# Altium PCB CH32F&V208W-R0.PcbDoc (part 1 of 3)
Units mm, origin at the board's own origin, x right, y up, seen from the top; angles counter-clockwise.
Board outline 86.5 x 95 mm, 2 copper layers (Top Layer, Bottom Layer); 65 components, 96 nets, 363 pads, 852 vias.
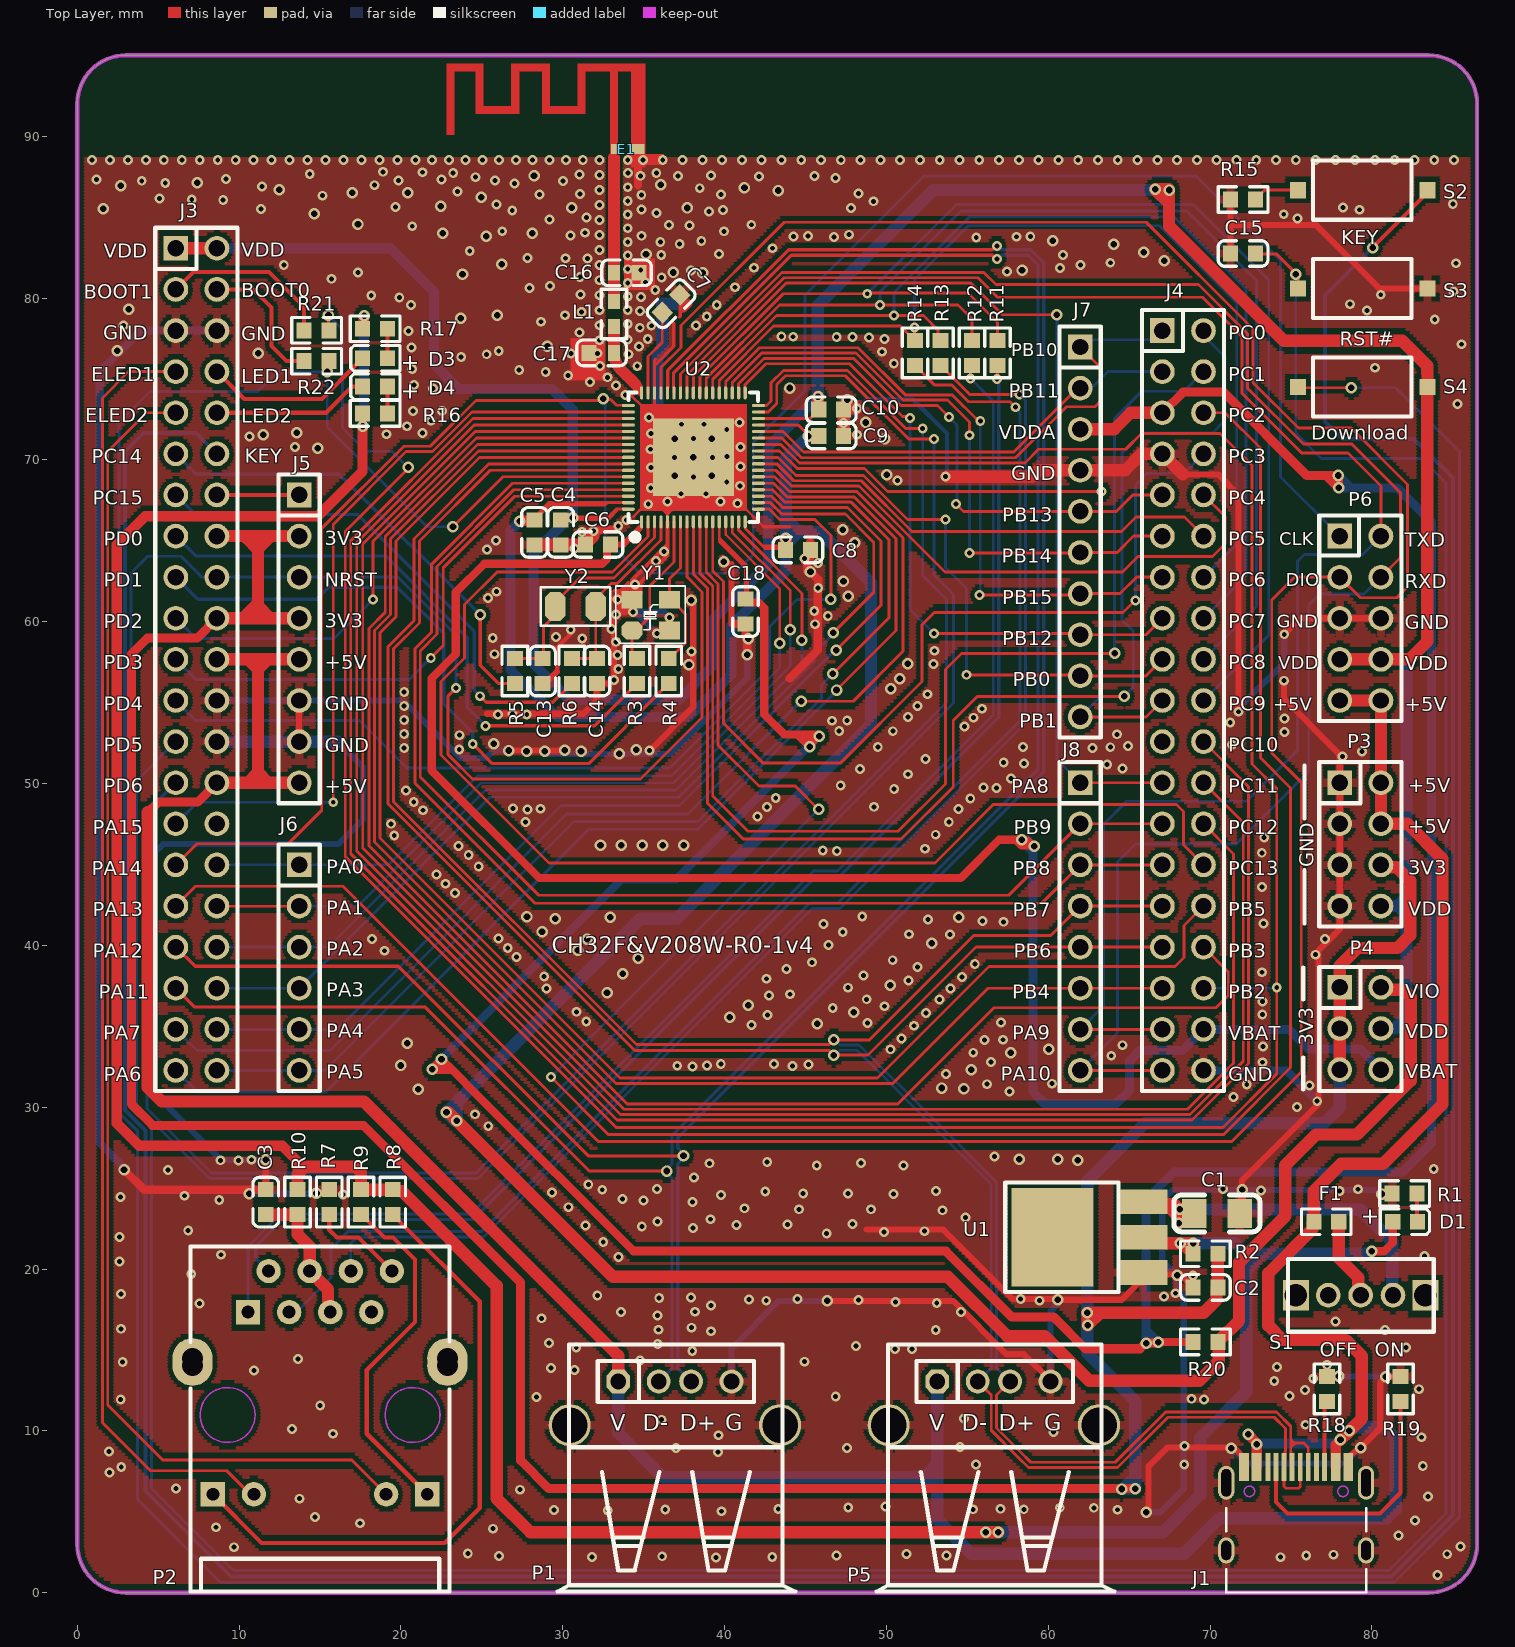
[diagram p0: Top Layer view]
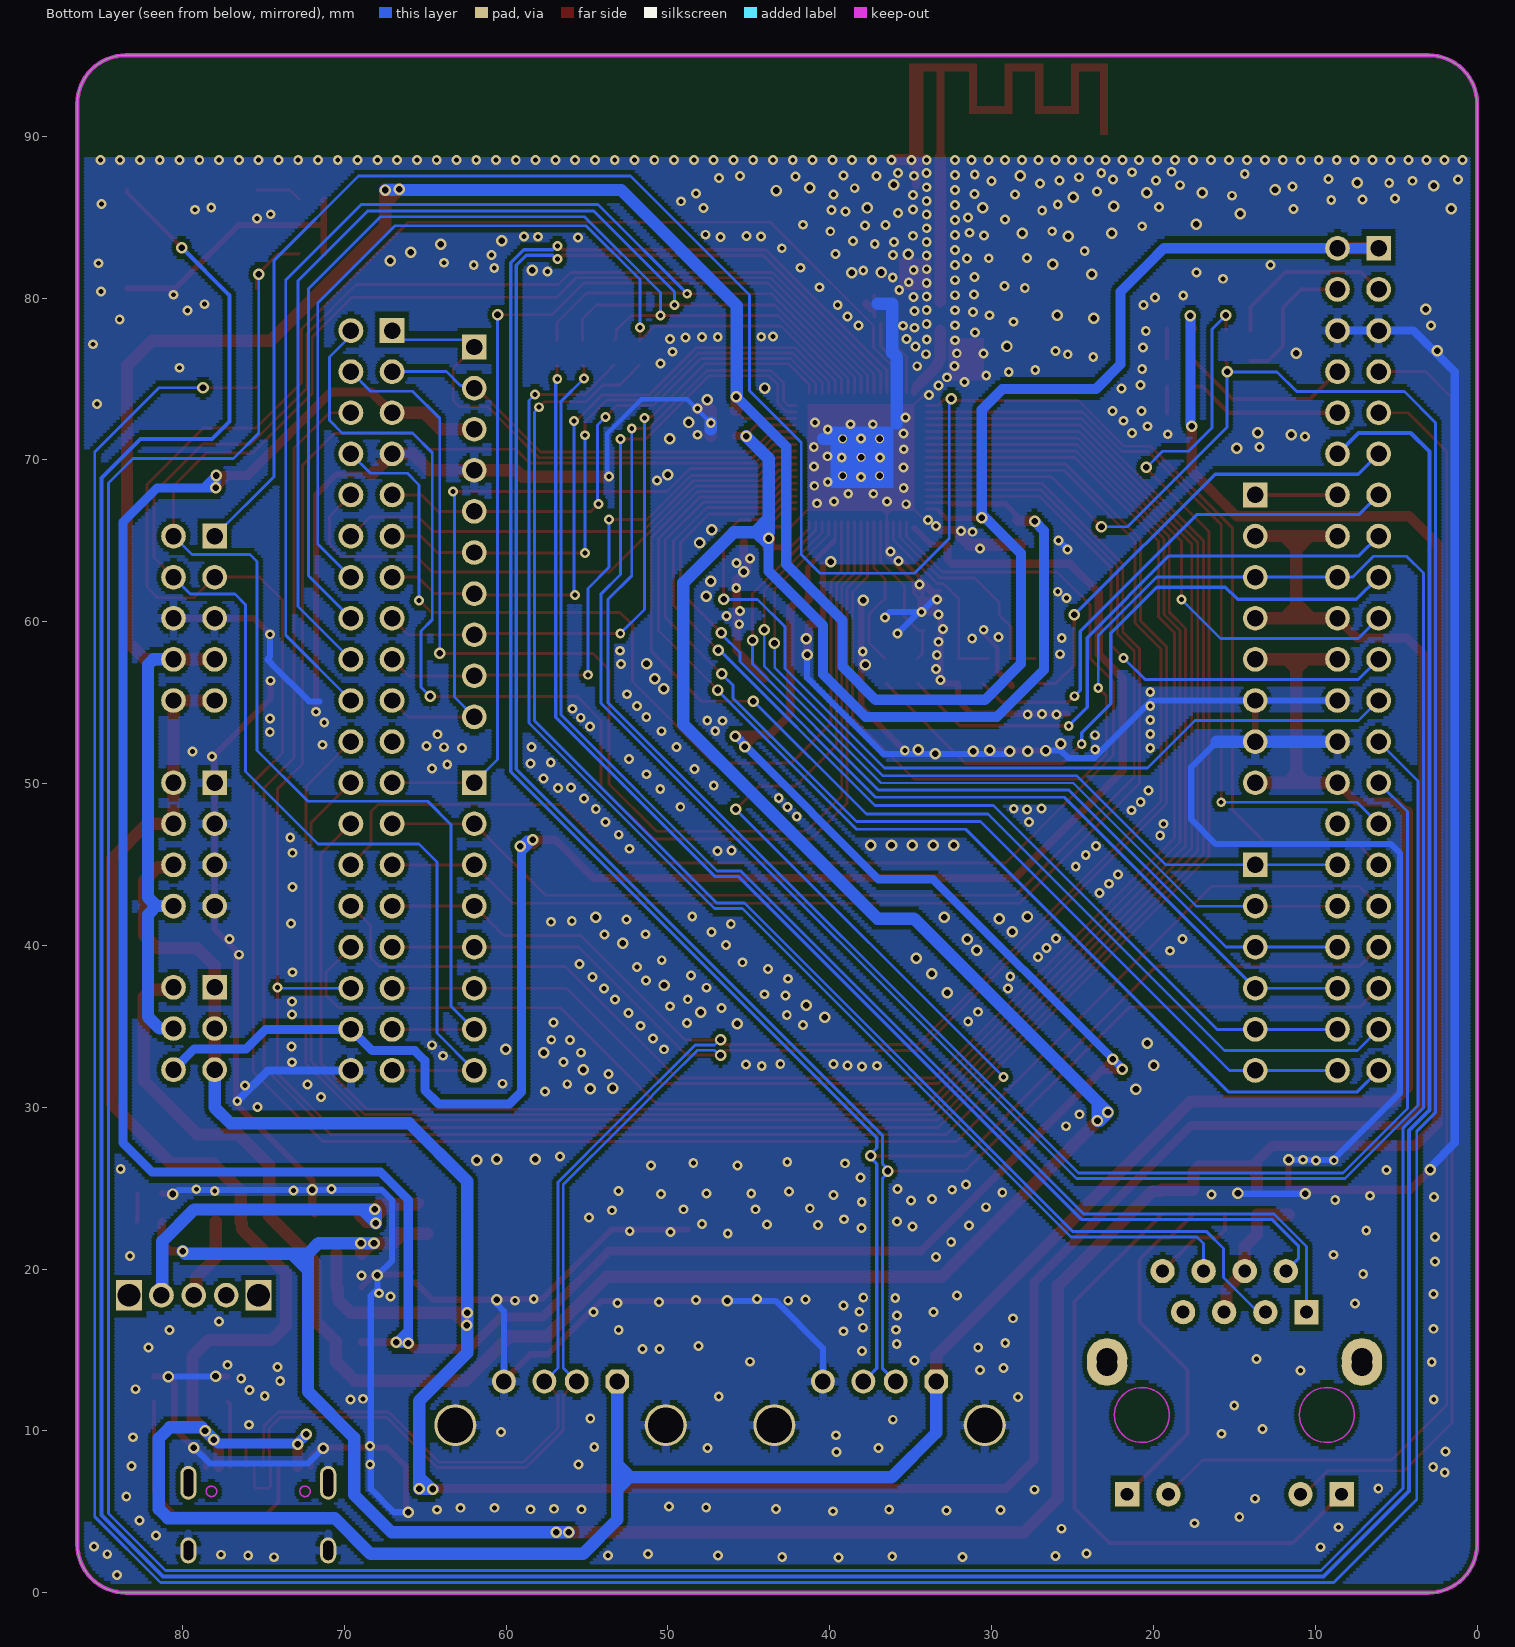
[diagram p1: Bottom Layer view, seen from below]

## Layer stack, top to bottom
Top Solder: solder mask 0.0102, Solder Resist, Dk 3.5
Top Layer: signal copper 0.0356
Dielectric 1: dielectric 0.32, FR-4, Dk 4.8
Bottom Layer: signal copper 0.0356
Bottom Solder: solder mask 0.0102, Solder Resist, Dk 3.5

## Board outline
0,3 ccw(c3,3) 3,0 83.5,0 ccw(c83.5,3) 86.5,3 86.5,92 ccw(c83.5,92) 83.5,95 3,95 ccw(c3,92) 0,92

## Design rules (kind name [scope] priority, off if disabled: settings)
Clearance Clearance_2 [InNet('ANT') or InNet('NetC16_2')] p1: gap=0.152 ignorepadtopadclearanceinfootprint=FALSE
Clearance Clearance_1 [InPolygon] p2: gap=0.254 ignorepadtopadclearanceinfootprint=FALSE
Clearance [All] p3: gap=0.152 ignorepadtopadclearanceinfootprint=FALSE except(0.203: Arc-Via Track-Via)
ComponentClearance [All] p1 off: gap=0.254 collisioncheckmode=3 verticalgap=0.254 showdistances=FALSE
DiffPairsRouting [All] p1: maxlimit=0.254 minlimit=0.152 mostfreqgap=0.152 toplayer_minwidth=0.127 toplayer_maxwidth=0.381 toplayer_prefwidth=0.203 bottomlayer_minwidth=0.127 bottomlayer_maxwidth=0.381 bottomlayer_prefwidth=0.203 maxuncoupledlength=12.7
MinimumSolderMaskSliver [All] p1 off: minsoldermaskwidth=0.254
PolygonConnect PolygonConnect_1 [IsVia] p1: connectstyle=Direct reliefconductorwidth=0.254 reliefentries=4 polygonreliefangle="90 Angle" airgapwidth=0.254
PolygonConnect [All] p2: connectstyle=Relief reliefconductorwidth=0.508 reliefentries=4 polygonreliefangle="90 Angle" airgapwidth=0.254
RoutingVias [All] p1: holewidth=0.406 width=0.711 viastyle="Through Hole" minholewidth=0.305 minwidth=0.61 maxholewidth=0.711 maxwidth=1.27
SilkToSilkClearance [All] p1 off: silktosilkclearance=0.254
SilkToSolderMaskClearance [IsPad] p1 off: minsilkscreentomaskgap=0.254 clearancetoexposedcopper=TRUE
SolderMaskExpansion [All] p1: expansion=0.102 istentingtop=FALSE
Width [All] p1: maxlimit=2.54 minlimit=0.152 preferedwidth=0.254
25 further rules are at their usual default settings.

## Classes and differential pairs
differential pair NewDifferentialPair2: +PB6 -PB7
differential pair NewDifferentialPair1: +PA11 -PA12

## Components (designator, comment, footprint, x,y, rotation, side; value= is the part's Value field where it differs from the comment)
C1 "10uF" 3216_C 69.027,23.44 r180 top
C2 "10uF" 0603_C#1 70.479,18.865 r180 top
C3 "1uF" 0603_C#1 11.645,24.905 r270 top
C4 "0.1uF" 0603_C#1 29.875,66.291 r270 top
C5 "0.1uF" 0603_C#1 28.252,64.751 r90 top
C6 "0.1uF" 0603_C#1 32.943,64.776 r180 top
C7 "1uF" 0603_C#1 36.149,79.104 r45 top
C8 "0.1uF" 0603_C#1 43.758,64.44 r0 top
C9 "0.1uF" 0603_C#1 45.815,71.476 r0 top
C10 "0.1uF" 0603_C#1 47.355,73.102 r180 top
C13 "12pF" 0603_C#1 28.757,56.185 r90 top
C14 "12pF" 0603_C#1 32.114,56.185 r90 top
C15 "0.1uF" 0603_C#1 71.266,82.754 r0 top
C16 "1.5pF" 0603_C#2 34.705,81.561 r180 top
C17 "1pF" 0603_C#2 31.626,76.609 r0 top
C18 "0.1uF" 0603_C#1 41.291,61.391 r270 top
D1 "power" 0603+ 81.284,22.922 r0 top
D3 "RED" 0603+ 19.17,76.277 r180 top
D4 "RED" 0603+ 19.17,74.524 r180 top
E1 "ANTENNA" ANT-F-1-2.4G-1.6 33.17,89.204 r0 top
F1 "500mA" 0603#1 76.407,22.922 r0 top
J1 "TYPE-C-Receptacle-2.0" TYPE-C-Receptacle-2.0 75.316,7.763 r0 top
J3 "Header 21X2" IDC42-2.54mm 6.09,83.072 r0 top locked
J4 "Header 19X2" IDC38-2.54mm 67.05,77.992 r0 top locked
J5 "Header 8" SIP8-2.54mm 13.71,67.832 r0 top locked
J6 "Header 6" SIP6-2.54MM 13.71,44.972 r0 top locked
J7 "Header 10" SIP10-2.54mm 61.97,76.976 r0 top locked
J8 "Header 8" SIP8-2.54mm 61.97,50.052 r0 top locked
L1 "1.8nH" 0603#2 33.165,78.244 r90 top
P1 "USB" USBAF 33.427,13.054 r0 top
P2 "HR911105A" HR911105A 10.55,17.336 r0 top
P3 "HEADER 4x2" IDC8-2.54mm 78.014,50.052 r0 top
P4 "Psel" IDC6-2.54mm 78.014,37.402 r270 top
P5 "USB" USBAF 53.138,13.054 r0 top
P6 "LINK" IDC10-2.54mm 78.014,55.132 r0 top
R1 "1K" 0603#1 81.249,24.665 r0 top
R2 "0Ω" 0603#1 70.479,20.943 r180 top
R3 "NC(0R)" 0603#1 34.581,56.185 r90 top
R4 "NC(0R)" 0603#1 36.544,56.185 r90 top
R5 "NC(0R)" 0603#1 27.041,56.185 r90 top
R6 "NC(0R)" 0603#1 30.56,56.185 r90 top
R7 "0Ω" 0603#1 15.57,24.905 r270 top
R8 "1K" 0603#1 19.494,24.905 r270 top
R9 "1K" 0603#1 17.532,24.905 r270 top
R10 "0Ω" 0603#1 13.607,23.365 r90 top
R11 "NC(0R)" 0603#1 56.864,77.385 r270 top
R12 "NC(0R)" 0603#1 55.281,77.385 r270 top
R13 "NC(0R)" 0603#1 53.342,77.385 r270 top
R14 "NC(0R)" 0603#1 51.759,77.385 r270 top
R15 "10K" 0603#1 71.266,86.089 r0 top
R16 "1K" 0603#1 17.63,72.873 r0 top
R17 "1K" 0603#1 17.63,78.105 r0 top
R18 "NC(5.1K)" 0603#1 77.217,11.825 r90 top
R19 "NC(5.1K)" 0603#1 81.768,11.825 r90 top
R20 "0Ω" 0603#1 70.479,15.498 r180 top
R21 "10K" 0603#1 15.554,78.004 r180 top
R22 "10K" 0603#1 14.014,76.099 r0 top
S1 "SW SPDT" KEY_B 83.3,18.388 r180 top
S2 "KEY" SMD_6.1x3.65x2.5mm-KEY 83.423,86.665 r180 top
S3 "RST#" SMD_6.1x3.65x2.5mm-KEY 83.423,80.582 r180 top
S4 "Download" SMD_6.1x3.65x2.5mm-KEY 83.423,74.499 r180 top
U1 "1117-3.3V" SOT-223 65.851,19.784 r90 top
U2 "CH32V208W" QFN68_8x8 38.068,70.156 r0 top
Y1 "32MHz" XT3225 34.283,59.462 r0 top
Y2 "32768Hz" FC-135 29.534,60.935 r0 top

## Footprints (in the part's own frame and the unit in brackets; to place one, negate y for a bottom-side part, rotate by r counter-clockwise, add the part's x,y. Pads: shape width x height; smd on the part's side, far side on the other; paste and mask are expansions set on the pad)
0603#1 [mm]
  rect 0.93x0.98 smd: 1(0,0) 2(1.54,0)
  silkscreen extent -0.76,-0.79 2.3,0.79
0603#2 [mm]
  rect 0.93x0.714 smd: 1(0,0) 2(1.54,0)
  silkscreen extent -0.76,-0.79 2.3,0.79
0603+ [mm]
  rect 0.93x0.98 smd: 1(0,0) 2(1.54,0)
  silkscreen extent -0.76,-0.79 2.27,0.79
0603_C#1 [mm]
  rect 0.93x0.98 smd: 1(0,0) 2(1.54,0)
  silkscreen extent -0.76,-0.79 2.31,0.79
0603_C#2 [mm]
  rect 0.93x0.98 smd: 1(0,0)
  rect 0.714x0.98 smd: 2(1.54,0)
  silkscreen extent -0.76,-0.79 2.31,0.79
3216_C [mil]
  rect 60x70 smd: 1(0,0) 2(-110,0)
  silkscreen extent -160,-45 50,45
ANT-F-1-2.4G-1.6 [mm]
  rect 0.8x0.6 smd mask+0: 0(1.483,0)
  rect 0.4x0.6 smd mask+0: 1(0,0)
  Top Layer region: 0.24,5.027 -0.26,5.027 -0.26,-0.304 0.24,-0.304
  Top Layer region: 1.94,5.002 1.04,5.002 1.04,-0.304 1.94,-0.304
  Top Layer region: 1.94,5.296 -2.26,5.296 -2.26,4.796 1.94,4.796
  Top Layer region: -1.76,4.977 -2.26,4.977 -2.26,2.157 -1.76,2.157
  Top Layer region: -1.85,2.651 -4.39,2.651 -4.39,2.156 -1.85,2.156
  Top Layer region: -3.96,4.976 -4.46,4.976 -4.46,2.156 -3.96,2.156
  Top Layer region: -3.96,5.296 -6.36,5.296 -6.36,4.796 -3.96,4.796
  Top Layer region: -5.86,4.977 -6.36,4.977 -6.36,2.157 -5.86,2.157
  Top Layer region: -5.875,2.657 -8.364,2.657 -8.364,2.157 -5.875,2.157
  Top Layer region: -8.06,4.977 -8.56,4.977 -8.56,2.157 -8.06,2.157
  Top Layer region: -8.06,5.296 -10.36,5.296 -10.36,4.796 -8.06,4.796
  Top Layer region: -9.86,4.976 -10.36,4.976 -10.36,0.856 -9.86,0.856
FC-135 [mil]
  oct 50x70 smd: 1(0,0) 2(98.43,0)
  silkscreen extent -35,-47 133,47
HR911105A [mm]
  rect 1.5x1.5 hole 0.8: 1(0,0) 9(-2.175,-11.252) 12(11.075,-11.252)
  round 1.5 hole 0.8: 2(1.27,2.54) 3(2.54,0) 4(3.81,2.54) 5(5.08,0) 6(6.35,2.54) 7(7.62,0) 8(8.89,2.54) 10(0.365,-11.252) 11(8.535,-11.252)
  round 2.5 hole 1.3: ""(-3.43,-2.852) ""(-3.43,-3.3) ""(12.32,-3.3) ""(12.32,-2.852)
  Keep-Out Layer circle w0.1: c10.165,-6.352 r1.7
  Keep-Out Layer circle w0.1: c-1.265,-6.352 r1.7
  silkscreen extent -3.55,-17.27 12.45,4.06
IDC6-2.54mm [mil]
  rect 60x60 hole 40: 1(0,0)
  round 60 hole 40: 2(0,100) 3(100,0) 4(100,100) 5(200,0) 6(200,100)
  silkscreen extent -50,-50 252,150
IDC8-2.54mm [mil]
  rect 60x60 hole 40: 1(0,0)
  round 60 hole 40: 2(100,0) 3(0,-100) 4(100,-100) 5(0,-200) 6(100,-200) 7(0,-300) 8(100,-300)
  silkscreen extent -50,-350 150,50
IDC10-2.54mm [mil]
  rect 60x60 hole 40: 1(0,400)
  round 60 hole 40: 2(100,400) 3(0,300) 4(100,300) 5(0,200) 6(100,200) 7(0,100) 8(100,100) 9(0,0) 10(100,0)
  silkscreen extent -50,-50 150,450
IDC38-2.54mm [mil]
  rect 60x60 hole 40: 1(0,0)
  round 60 hole 40: 2(100,0) 3(0,-100) 4(100,-100) 5(0,-200) 6(100,-200) 7(0,-300) 8(100,-300) 9(0,-400) 10(100,-400) 11(0,-500) 12(100,-500) 13(0,-600) 14(100,-600) 15(0,-700) 16(100,-700) 17(0,-800) 18(100,-800) 19(0,-900) 20(100,-900) 21(0,-1000) 22(100,-1000) 23(0,-1100) 24(100,-1100) 25(0,-1200) 26(100,-1200) 27(0,-1300) 28(100,-1300) 29(0,-1400) 30(100,-1400) 31(0,-1500) 32(100,-1500) 33(0,-1600) 34(100,-1600) 35(0,-1700) 36(100,-1700) 37(0,-1800) 38(100,-1800)
  silkscreen extent -50,-1850 150,50
IDC42-2.54mm [mil]
  rect 60x60 hole 40: 1(0,0)
  round 60 hole 40: 2(100,0) 3(0,-100) 4(100,-100) 5(0,-200) 6(100,-200) 7(0,-300) 8(100,-300) 9(0,-400) 10(100,-400) 11(0,-500) 12(100,-500) 13(0,-600) 14(100,-600) 15(0,-700) 16(100,-700) 17(0,-800) 18(100,-800) 19(0,-900) 20(100,-900) 21(0,-1000) 22(100,-1000) 23(0,-1100) 24(100,-1100) 25(0,-1200) 26(100,-1200) 27(0,-1300) 28(100,-1300) 29(0,-1400) 30(100,-1400) 31(0,-1500) 32(100,-1500) 33(0,-1600) 34(100,-1600) 35(0,-1700) 36(100,-1700) 37(0,-1800) 38(100,-1800) 39(0,-1900) 40(100,-1900) 41(0,-2000) 42(100,-2000)
  silkscreen extent -50,-2050 150,50
KEY_B [mm]
  rect 1.6x1.9 hole 1.4: 0(0,0) 0(8,0)
  round 1.524 hole 1.016: 1(4,0) 2(2,0) 3(6,0)
  silkscreen extent -0.52,-2.24 8.48,2.26
QFN68_8x8 [mm]
  round 0.559 hole 0.406 mask+0.051: 0(-1.143,-1.143) 0(-1.143,1.143) 0(0,0) 0(1.143,-1.143) 0(1.143,1.143)
  rect 5x4.8 smd mask+0.051: 0(0,0)
  oval 0.2x0.8 smd mask+0.051: 1(-3.2,-3.982) 2(-2.8,-3.982) 3(-2.4,-3.982) 4(-2,-3.982) 5(-1.6,-3.982) 6(-1.2,-3.982) 7(-0.8,-3.982) 8(-0.4,-3.982) 9(0,-3.982) 10(0.4,-3.982) 11(0.8,-3.982) 12(1.2,-3.982) 13(1.6,-3.982) 14(2,-3.982) 15(2.4,-3.982) 16(2.8,-3.982) 17(3.2,-3.982) 35(3.2,3.982) 36(2.8,3.982) 37(2.4,3.982) 38(2,3.982) 39(1.6,3.982) 40(1.2,3.982) 41(0.8,3.982) 42(0.4,3.982) 43(0,3.982) 44(-0.4,3.982) 45(-0.8,3.982) 46(-1.2,3.982) 47(-1.6,3.982) 48(-2,3.982) 49(-2.4,3.982) 50(-2.8,3.982) 51(-3.2,3.982)
  oval 0.8x0.2 smd mask+0.051: 18(4.018,-3.2) 19(4.018,-2.8) 20(4.018,-2.4) 21(4.018,-2) 22(4.018,-1.6) 23(4.018,-1.2) 24(4.018,-0.8) 25(4.018,-0.4) 26(4.018,0) 27(4.018,0.4) 28(4.018,0.8) 29(4.018,1.2) 30(4.018,1.6) 31(4.018,2) 32(4.018,2.4) 33(4.018,2.8) 34(4.018,3.2) 52(-4.018,3.2) 53(-4.018,2.8) 54(-4.018,2.4) 55(-4.018,2) 56(-4.018,1.6) 57(-4.018,1.2) 58(-4.018,0.8) 59(-4.018,0.4) 60(-4.018,0) 61(-4.018,-0.4) 62(-4.018,-0.8) 63(-4.018,-1.2) 64(-4.018,-1.6) 65(-4.018,-2) 66(-4.018,-2.4) 67(-4.018,-2.8) 68(-4.018,-3.2)
  silkscreen extent -4,-5.13 4,4
SIP6-2.54MM [mil]
  rect 60x60 hole 40: 1(0,0)
  round 60 hole 40: 2(0,-100) 3(0,-200) 4(0,-300) 5(0,-400) 6(0,-500)
  silkscreen extent -50,-550 50,50
SIP8-2.54mm [mil]
  rect 60x60 hole 40: 1(0,0)
  round 60 hole 40: 2(0,-100) 3(0,-200) 4(0,-300) 5(0,-400) 6(0,-500) 7(0,-600) 8(0,-700)
  silkscreen extent -50,-750 50,50
SIP10-2.54mm [mil]
  rect 60x60 hole 40: 1(0,0)
  round 60 hole 40: 2(0,-100) 3(0,-200) 4(0,-300) 5(0,-400) 6(0,-500) 7(0,-600) 8(0,-700) 9(0,-800) 10(0,-900)
  silkscreen extent -50,-950 50,50
SMD_6.1x3.65x2.5mm-KEY [mm]
  rect 1x1 smd: 1(0,0) 2(8,0)
  silkscreen extent 0.98,-1.83 7.08,1.83
SOT-223 [mil]
  rect 60x120 smd: 1(0,0) 2(86,0) 3(172,0)
  rect 240x200 smd: ""(86,220)
  silkscreen extent -47,60 219,335
TYPE-C-Receptacle-2.0 [mm]
  oval 1x1.6 hole 0.6 slot 1.2 at 90 deg mask+0.051: 0(-4.32,-5.15) 0(4.32,-5.15)
  oval 1x2.1 hole 0.6 slot 1.7 at 90 deg mask+0.051: 0(-4.32,-0.97) 0(4.32,-0.97)
  rect 0.6x1.75 smd mask+0.051: A1(-3.225,0) A4(-2.45,0) B1(3.225,0) B4(2.45,0)
  rect 0.3x1.75 smd mask+0.051: A5(-1.25,0) A6(-0.25,0) A7(0.25,0) A8(1.25,0) B5(1.75,0) B6(0.75,0) B7(-0.75,0) B8(-1.75,0)
  Keep-Out Layer circle w0.1: c-2.89,-1.5 r0.325
  Keep-Out Layer circle w0.1: c2.89,-1.5 r0.325
  silkscreen extent -4.32,-7.75 4.32,-2.55
USBAF [mm]
  round 2.6 hole 2.2: 0(-3,-2.7) 0(10,-2.7)
  oct 1.473x1.473 hole 0.965: 1(0,0)
  round 1.473 hole 0.965: 2(2.5,0) 3(4.5,0) 4(7,0)
  silkscreen extent -3.75,-12.99 10.95,2.29
XT3225 [mm]
  oct 1.3x1.1 smd: 1(0,0)
  rect 1.3x1.1 smd: 2(2.3,0) 3(2.3,1.9) 4(0,1.9)
  silkscreen extent -1.02,-0.8 3.27,2.74

## Part data
C1 C2 C3 C4 C5 C6 C7 C8 C9 C10 C13 C14 C15 C16 C17 C18: library part CAP, "Capacitor"
D1 D3 D4: library part LED0, "Typical INFRARED GaAs LED", LatestRevisionDate=08-Jul-2005, LatestRevisionNote="Mech Layer 1 removed.", PackageDescription="LED; 2 Leads", PackageReference=LED-0, Published=8-Jun-2000, Publisher="Altium Limited"
E1: "Generic Antenna"
F1: library part FUSE1, "Fuse"
J1: "Type-C USB2.0 母座"
J3: "Header, 21-Pin, Dual row", LatestRevisionDate=17-Jul-2002, LatestRevisionNote="Re-released for DXP Platform.", Publisher="Altium Limited"
J4: "Header, 19-Pin, Dual row", LatestRevisionDate=17-Jul-2002, LatestRevisionNote="Re-released for DXP Platform.", Publisher="Altium Limited"
J5 J8: "Header, 8-Pin", LatestRevisionDate=17-Jul-2002, LatestRevisionNote="Re-released for DXP Platform.", Publisher="Altium Limited"
J6: "Header, 6-Pin", LatestRevisionDate=17-Jul-2002, LatestRevisionNote="Re-released for DXP Platform.", Publisher="Altium Limited"
J7: "Header, 10-Pin", LatestRevisionDate=17-Jul-2002, LatestRevisionNote="Re-released for DXP Platform.", Publisher="Altium Limited"
L1: library part INDUCTOR
P1 P5: "USB Port"
P3: "Header, 4-Pin, Dual row"
P4: library part "Header 3X2H", "Header, 3-Pin, Dual row, Right Angle", LatestRevisionDate=17-Jul-2002, LatestRevisionNote="Re-released for DXP Platform.", Publisher="Altium Limited"
P6: library part "Header 5X2H", "Header, 5-Pin, Dual row, Right Angle", LatestRevisionDate=17-Jul-2002, LatestRevisionNote="Re-released for DXP Platform.", Publisher="Altium Limited"
R1 R2 R3 R4 R5 R6 R7 R8 R9 R10 R11 R12 R13 R14 R15 R16 R17 R18 R19: library part RES
R20: library part R
R21 R22: library part Res2, "Resistor"
S2 S3 S4: library part KEY1
U2: "RISC-V BLE5.3 MCU, 10M Ethernet, 2*USB, CAN"
Y1 Y2: library part XTAL, "Crystal Oscillator", LatestRevisionDate=17-Jul-2002, LatestRevisionNote="Re-released for DXP Platform.", PackageDescription="Crystal, Thru-Hole; 2 Leads; Body 3.1 x 8.2 mm (Dia.xH)", PackageReference=R38, Published=8-Jun-2000, Publisher="Altium Limited"

## Via types
v1: diameter 0.61, hole 0.305, Top Layer to Bottom Layer, tented both sides, 680 vias
v2: diameter 0.711, hole 0.406, Top Layer to Bottom Layer, tented both sides, 172 vias

## Nets (pads, with @x,y where several pads share a name; then routed paths per layer and width w, separated by ;. In a path a pad name is that pad's centre, name@x,y a point inside that pad or via, vN(x,y) a via of type N, cw(c..) or ccw(c..) an arc to the next point about the centre after c; other vN are vias at no path point)
3V3: C2.1 J3.16 J3.20 J5.2 J5.4 P3.6 P4.1 P4.3 P4.5 R2.1 | length 203.7
  Top Layer w0.559: J3.20@8.63,60.212 7.405,58.987 4.326,58.987 3.341,58.001 3.341,30.199 4.657,28.882 17.68,28.882 27.393,19.17 27.393,8.177 29.141,6.429 64.532,6.429 v2(65.375,6.429)
  Top Layer w0.762: J3.20@8.63,60.212 10.428,60.212 11.17,60.212 ; J3.16@8.63,65.292 10.428,65.292 11.17,65.292 ; 10.428,60.359 10.428,60.388 11.17,61.13 ; 10.428,65.192 10.442,65.192 11.17,64.464 ; 11.861,65.202 11.17,64.511 ; J5.4@13.71,60.212 11.926,60.212 ; J5.2@13.71,65.292 11.861,65.292 11.17,65.292 ; v2@62.405,17.187 62.431,17.161 v2(62.431,16.534) 63.189,17.292 ; v2(62.408,17.292) 63.189,17.292 ; R2.1@70.479,20.943 C2.1@70.479,18.865 70.395,18.781 70.395,18.092 69.595,17.292 63.189,17.292 ; P4.5@78.014,32.322 P4.3@78.014,34.862 P4.1@78.014,37.402 78.014,38.746 79.11,39.842 81.576,39.842 82.367,40.633 82.367,43.983 81.524,44.826 80.7,44.826 P3.6@80.554,44.972 ; 11.17,60.212 11.926,60.212 ; 11.17,60.212 11.17,60.968 ; 11.17,60.968 11.17,61.13 ; 11.17,60.968 11.926,60.212 ; 11.17,61.13 11.17,64.464 ; 11.17,64.464 11.17,64.511 ; 11.17,64.511 11.17,65.292
  Bottom Layer w0.762: v2(64.532,6.408) v2@64.616,6.408 ; v2@65.299,6.426 65.282,6.408 v2@64.616,6.408 ; v2(65.375,6.429) 65.375,7.167 ; P4.5@78.014,32.322 78.014,29.99 77.035,29.011 65.986,29.011 62.408,25.433 v2(62.408,17.292) 62.408,16.534 62.408,14.808 65.375,11.842 65.375,7.167 ; v2@64.616,6.408 65.375,7.167
3V3S: D1.1 R2.2 R8.1 R9.1 R10.2 R16.1 R17.1 U1.2 | length 191.5
  Top Layer w0.508: v2(79.976,21.098) 80.757,21.098 81.284,21.625 D1.1@81.284,22.922
  Top Layer w0.635: 13.607,25.868 13.607,26.435 13.607,26.673 ; 13.845,26.435 13.607,26.673 ; v2(17.63,72.083) 17.63,69.286 14.868,66.524 4.208,66.524 2.438,64.754 2.438,29.015 3.83,27.623 12.657,27.623 13.607,26.673 ; R17.1@17.63,78.105 17.705,78.18 17.705,78.879 v2(17.72,78.893)
  Top Layer w0.762: R10.2@13.607,24.905 13.607,25.868 14.054,26.314 17.197,26.314 17.532,25.979 R9.1@17.532,24.905 R8.1@19.494,24.905 19.578,24.821 20.05,24.821 25.913,18.959 25.913,5.825 27.999,3.739 v2(56.141,3.739) 56.895,3.739 v2(56.899,3.735) ; U1.2@64.862,22.191 66.739,22.191 66.739,21.844 66.994,21.588 v2@68.319,21.588 ; v2@68.319,21.588 68.957,21.588 v2(68.969,21.6) 68.969,20.973 R2.2@68.939,20.943 68.939,20.968 68.855,21.052 v2@68.319,21.588
  Bottom Layer w0.635: v2(17.63,72.083) 17.63,72.104 17.72,72.193 v2(17.72,78.893)
  Bottom Layer w0.762: v2(56.141,3.739) 67.079,3.739 69.392,6.052 69.392,9.573 72.241,12.423 72.241,19.926 ; v2(68.166,21.59) 68.176,21.6 v2(68.969,21.6) 71.584,21.6 72.241,20.943 ; v2(79.976,21.098) 79.821,20.943 73.258,20.943 ; 72.241,19.926 72.241,20.943 ; 72.241,19.926 73.258,20.943 ; 72.241,20.943 73.258,20.943
+5V: F1.1 J1.A4 J1.B4 J3.22 J3.28 J5.5 J5.8 P1.1 P3.2 P3.4 P5.1 P6.9 P6.10 | length 227.9
  Top Layer w0.559: 4.357,48.219 4.996,48.858 7.436,48.858 J3.28@8.63,50.052
  Top Layer w0.635: v2(72.346,9.792) 72.866,9.272 J1.A4@72.866,7.763 72.876,7.773 72.876,9.176 v2(72.886,9.186) ; J1.B4@77.766,7.763 77.766,9.139 78.055,9.428 v2(78.055,9.449)
  Top Layer w0.762: 4.357,48.219 4.357,31.218 5.219,30.356 17.714,30.356 33.427,14.643 P1.1@33.427,13.054 ; J3.28@8.63,50.052 10.546,50.052 ; J3.22@8.63,57.672 10.576,57.672 ; J5.8@13.71,50.052 11.794,50.052 ; J5.5@13.71,57.672 11.764,57.672 ; F1.1@76.407,22.897 76.407,24.824 78.083,26.5 80.675,26.5 84.355,30.18 84.355,45.345 82.189,47.512 P3.4@80.554,47.512 P3.2@80.554,50.052 P6.10@80.554,55.132 P6.9@78.014,55.132 ; F1.1@76.407,22.922 76.323,22.838 76.323,22.464 73.599,19.739 73.599,16.503 74.482,15.62 78.386,15.62 79.379,14.627 79.379,10.772 v2(78.607,10.001) v2(78.055,9.449) ; 10.546,50.052 11.17,50.052 ; 10.546,50.052 11.17,50.676 ; 10.576,57.672 11.17,57.672 ; 10.576,57.672 11.17,57.078 ; 11.17,50.052 11.794,50.052 ; 11.17,50.052 11.17,50.676 ; 11.17,50.676 11.17,57.078 ; 11.17,50.676 11.794,50.052 ; 11.17,57.078 11.764,57.672 ; 11.17,57.078 11.17,57.672 ; 11.17,57.672 11.764,57.672
  Bottom Layer w0.635: v2(72.346,9.792) 72.346,9.771 72.898,9.22 v2@72.898,9.14 ; v2@72.921,9.201 72.954,9.201 72.974,9.22 77.806,9.22 v2@78.035,9.449
  Bottom Layer w0.762: P1.1@33.427,13.054 33.427,9.888 36.189,7.127 52.308,7.127 ; P5.1@53.138,13.054 53.138,7.957 ; v2@78.035,9.449 78.812,10.227 80.776,10.227 81.461,9.542 81.461,5.163 80.904,4.606 70.591,4.606 68.383,2.398 55.255,2.398 53.138,4.515 53.138,6.382 ; 52.308,7.127 52.393,7.127 ; 52.308,7.127 53.138,7.957 ; 52.393,7.127 53.138,7.127 ; 52.393,7.127 53.138,6.382 ; 53.138,6.382 53.138,7.127 ; 53.138,7.127 53.138,7.957
ANT: C17.2 L1.1 U2.51 | length 13.1
  Top Layer w0.203: 33.714,75.096 34.829,73.981 U2.51@34.833,73.981 ; 33.839,75.092 cw(c33.839,74.913) 33.966,75.04 ; 33.963,75.206 34.752,74.418 cw(c34.472,74.138) U2.51@34.868,74.138 ; 33.997,75.08 34.817,74.26 cw(c34.695,74.138) U2.51@34.868,74.138 ; 34.041,75.49 34.496,75.035 cw(c33.598,74.138) 34.754,74.664 ; 34.133,75.258 34.595,74.796 cw(c33.937,74.138) U2.51@34.868,74.138 ; 34.568,74.959 cw(c33.844,74.235) U2.51@34.868,74.235 ; 34.617,74.8 34.754,74.664 ; 34.617,74.907 cw(c34.011,74.302) 34.868,74.302 U2.51@34.868,74.235 ; 34.698,74.547 cw(c34.289,74.138) U2.51@34.868,74.138 ; 34.754,74.664 cw(c33.598,74.138) U2.51@34.868,74.138 ; U2.51@34.868,74.138 U2.51@34.868,74.235
  Top Layer w0.714: C17.2@33.166,76.381 C17.2@33.166,76.609 ; L1.1@33.166,78.016 C17.2@33.166,76.609 ; 33.963,75.206 33.594,75.575 cw(c34.628,76.609) C17.2@33.166,76.609
BOOT0: R22.2 S4.2 U2.63 | length 270.7
  Top Layer w0.178: v2(15.447,75.434) 15.447,75.992 R22.2@15.554,76.099 ; v2(23.214,65.869) 26.301,68.956 U2.63@34.05,68.956 ; S4.2@75.423,74.499 75.466,74.456 v2(78.732,74.456)
  Bottom Layer w0.178: v2(23.214,65.869) 21.615,65.869 15.447,72.037 v2(15.447,75.434) 12.366,75.434 11.147,74.215 4.486,74.215 2.584,72.314 2.584,29.662 3.732,28.515 3.732,5.757 8.857,0.631 81.361,0.631 85.42,4.69 85.42,70.487 81.452,74.456 v2(78.732,74.456)
BOOT1: J4.34 R21.1 U2.28 | length 180.2
  Top Layer w0.178: v2(15.522,78.936) 15.522,78.036 R21.1@15.554,78.004 ; v2(20.439,69.537) 20.439,69.446 16.561,65.568 16.561,45.486 33.307,28.741 70.795,28.741 74.117,32.063 v1(74.117,37.389) 74.117,49.676 72.58,51.214 72.58,69.664 70.618,71.625 65.76,71.625 64.787,70.653 59.404,70.653 58.551,69.8 44.621,69.8 43.465,70.956 U2.28@42.085,70.956
  Bottom Layer w0.178: v2(15.522,78.936) 16.395,78.064 16.395,71.973 17.836,70.531 19.445,70.531 v2(20.439,69.537) ; J4.34@69.59,37.352 v1@73.944,37.352 ; v1@73.988,37.352 v1@73.944,37.352 ; v1(74.117,37.389) 73.981,37.389 v1@73.944,37.352
CC1: J1.A5 R19.1 | length 16.3
  Top Layer w0.254: J1.A5@74.066,7.763 74.066,5.611 74.781,4.897 80.487,4.897 81.768,6.178 R19.1@81.768,11.825
CC2: J1.B5 R18.1 | length 4.1
  Top Layer w0.254: J1.B5@77.066,7.763 77.066,11.674 R18.1@77.217,11.825
ELED1: J3.7 P2.10 | length 79.7
  Top Layer w0.178: J3.7@6.09,75.452 3.174,75.452 1.549,73.826 1.549,10.507 4.516,7.54 9.236,7.54 10.692,6.084 P2.10@10.915,6.084
ELED2: J3.9 P2.11 | length 83.6
  Top Layer w0.178: J3.9@6.09,72.912 4.27,72.912 1.879,70.521 1.879,11.601 5.289,8.191 16.979,8.191 P2.11@19.085,6.084
ERXN: P2.6 R13.2 | length 82.8
  Top Layer w0.178: R13.2@53.342,75.845 53.367,75.845 53.743,75.469 53.743,75.444 55.146,74.041 v1(58.217,74.041)
  Bottom Layer w0.178: P2.6@16.9,19.876 16.9,21.577 17.302,21.979 25.101,21.979 45.401,42.279 47.126,42.279 58.587,53.739 58.587,73.671 v1(58.217,74.041)
ERXP: P2.3 R14.2 | length 88.1
  Top Layer w0.178: R14.2@51.759,75.845 51.784,75.845 52.16,75.469 52.16,75.444 52.988,74.615 54.04,74.615 55.064,73.591 57.625,73.591 v1(57.963,73.254)
  Bottom Layer w0.178: P2.3@13.09,17.336 13.343,17.589 13.794,17.589 15.673,19.468 15.673,21.271 16.711,22.309 24.964,22.309 45.264,42.609 46.99,42.609 58.257,53.876 58.257,72.96 v1(57.963,73.254)
ETXN: P2.2 R11.2 | length 83.1
  Top Layer w0.203: v1(56.839,75.007) 56.864,75.032 R11.2@56.864,75.845
  Bottom Layer w0.203: P2.2@11.82,19.876 11.035,20.662 11.035,21.4 12.701,23.067 24.455,23.067 45.648,44.26 47.119,44.26 56.942,54.084 56.942,74.714 56.916,74.74 56.916,74.929 v1(56.839,75.007)
ETXP: P2.1 R12.2 | length 86
  Top Layer w0.178: v1(55.186,75.033) 55.186,75.75 R12.2@55.281,75.845
  Bottom Layer w0.178: P2.1@10.55,17.336 10.55,21.401 12.559,23.41 24.313,23.41 45.506,44.603 46.977,44.603 56.6,54.226 56.6,73.62 v1(55.186,75.033)